# Altium PCB DemoCat.PcbDoc
Units mil, origin at the board's own origin, x right, y up, seen from the top; angles counter-clockwise.
Board outline 3858.27 x 3858.27 mil, 2 copper layers (Top Layer, Bottom Layer); 48 components, 45 nets, 211 pads, 106 vias.
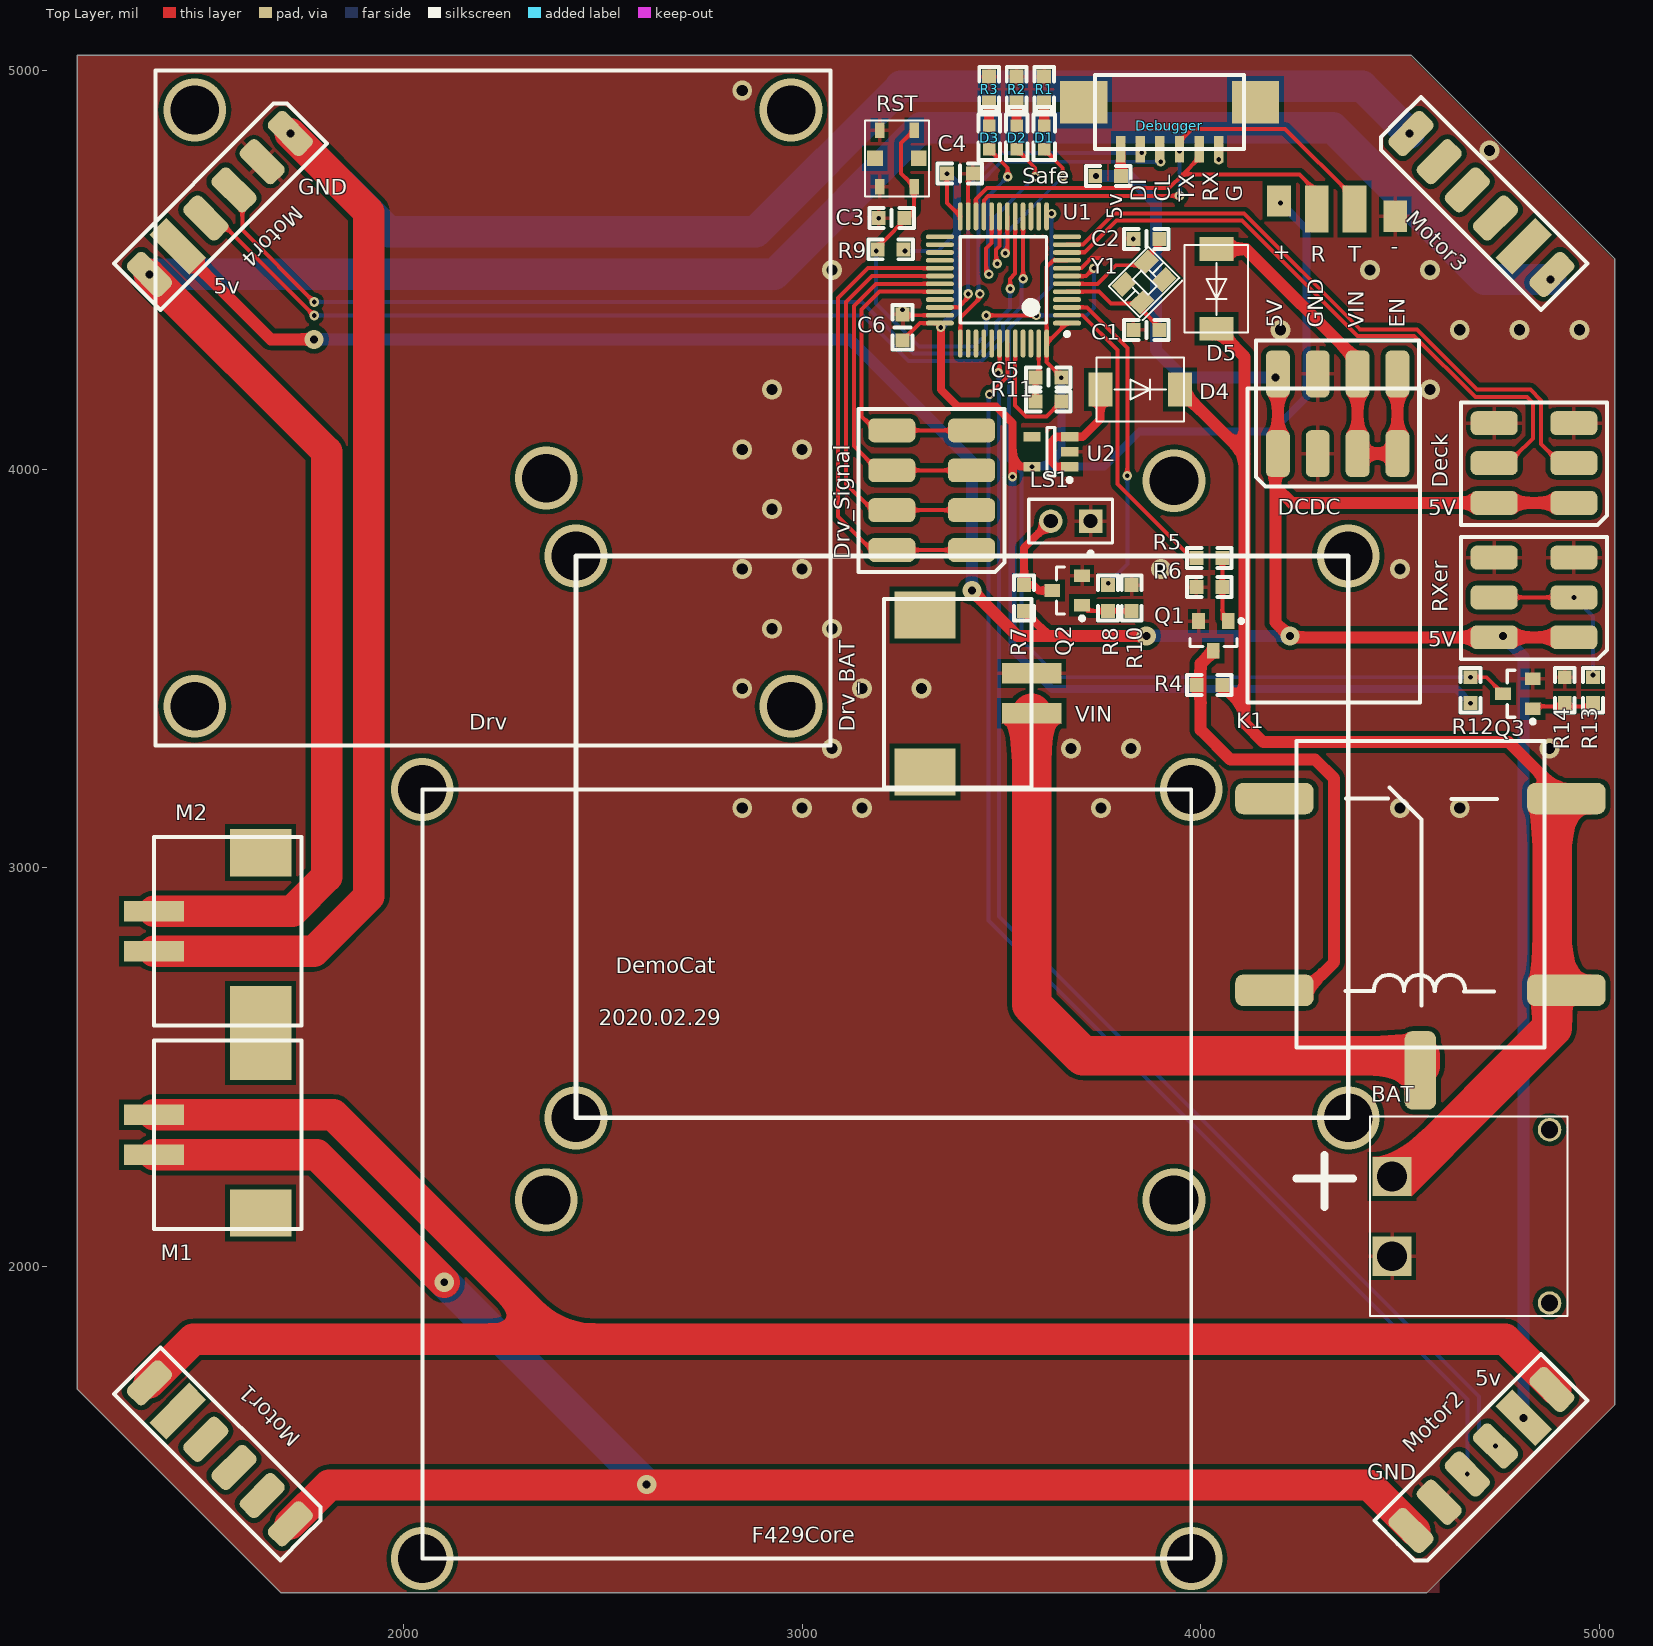
[diagram p0: Top Layer view]
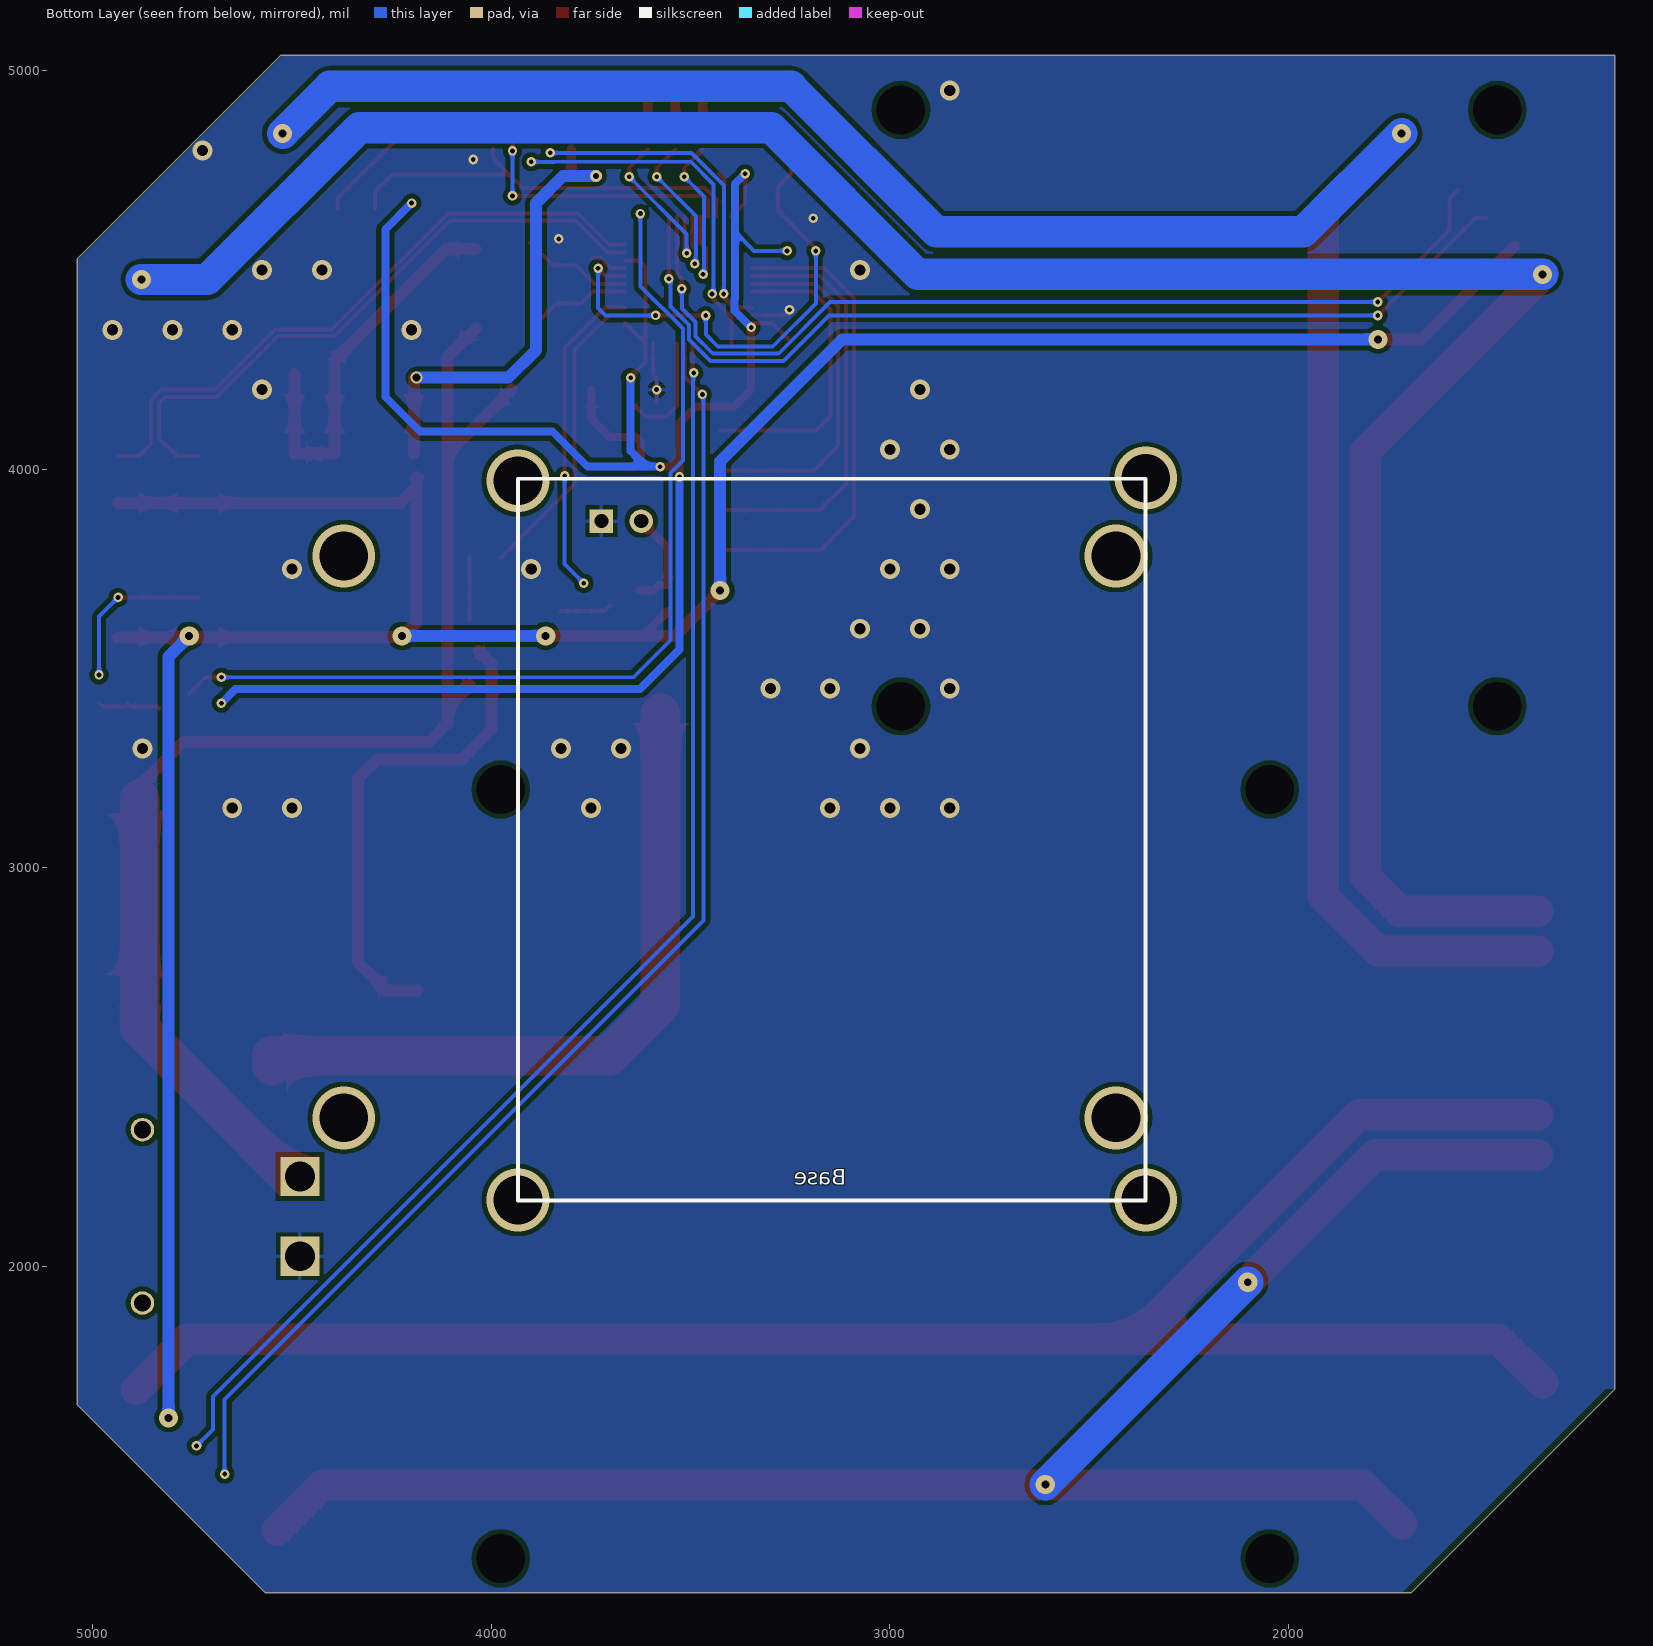
[diagram p1: Bottom Layer view, seen from below]
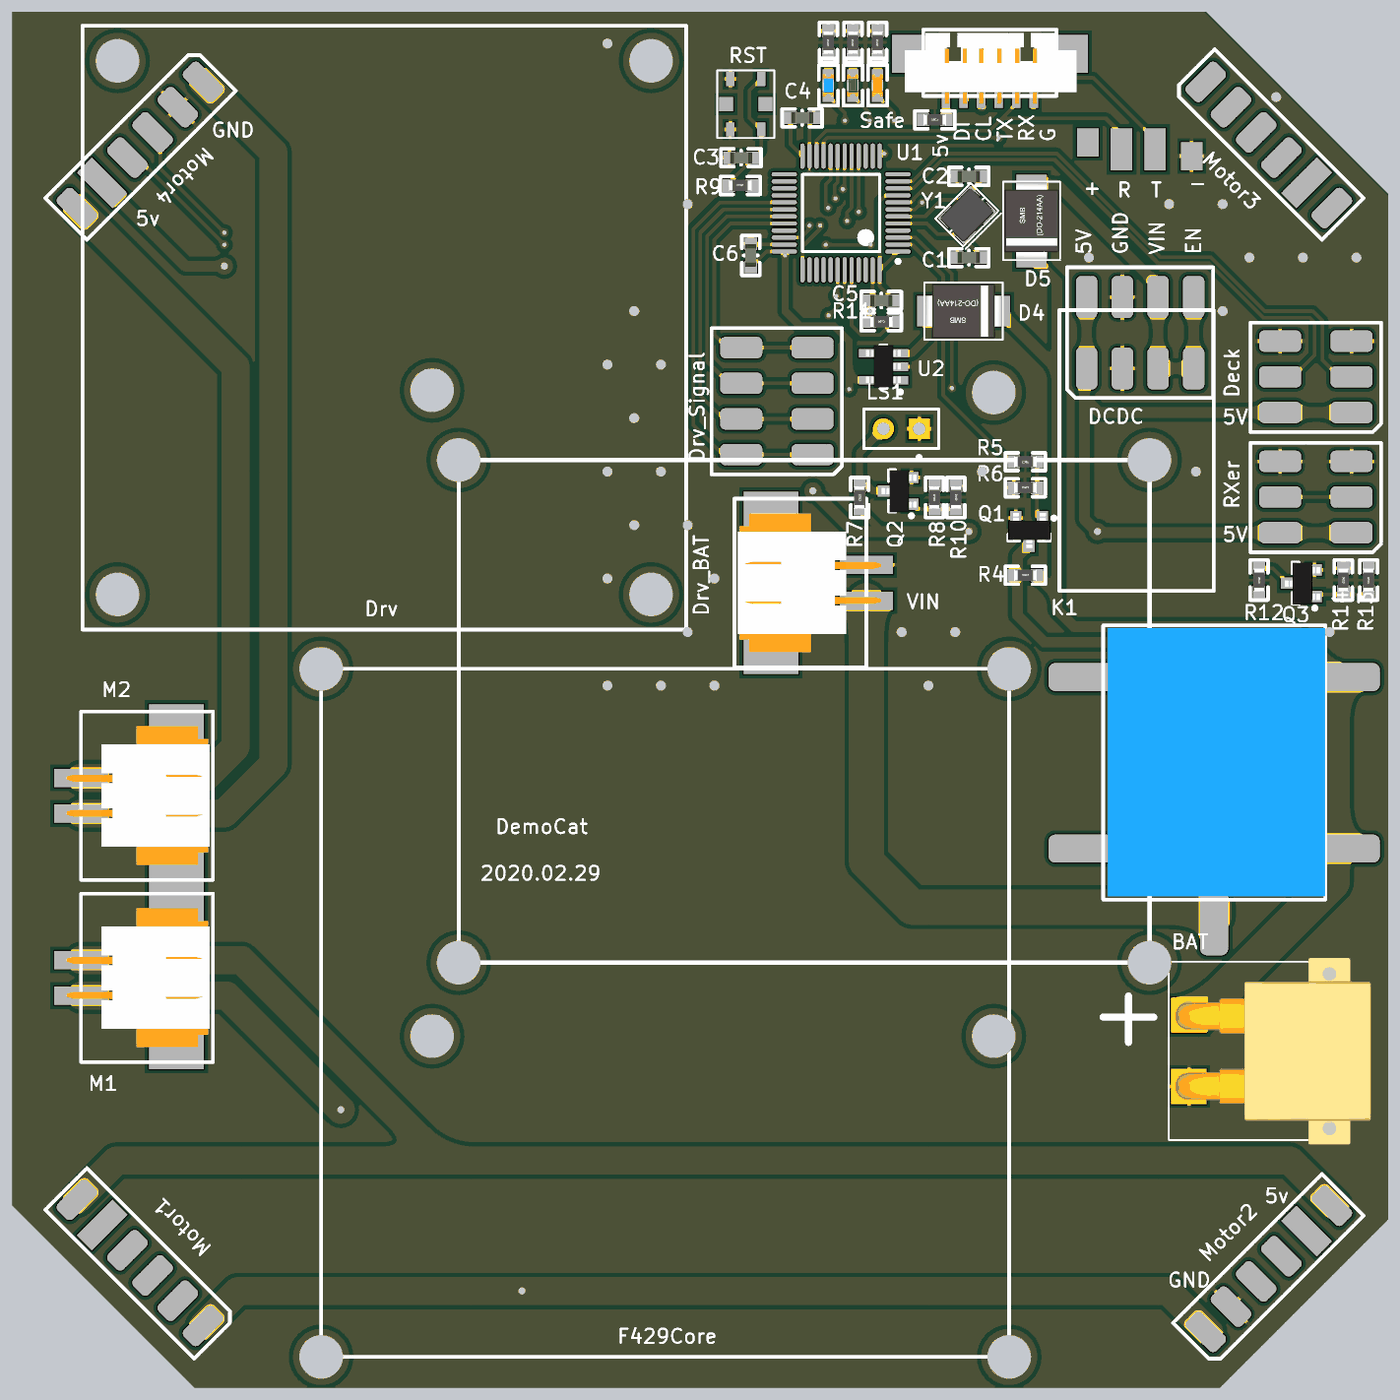
[diagram p2: 3D render of the assembled board from above, using the file's embedded part models]

## Layer stack, top to bottom
Top Solder: solder mask 0.4, Solder Resist, Dk 3.5
Top Layer: signal copper 1.4
Dielectric 1: dielectric 12.6, FR-4, Dk 4.8
Bottom Layer: signal copper 1.4
Bottom Solder: solder mask 0.4, Solder Resist, Dk 3.5

## Board outline
1692.91,1181.1 1181.1,1692.91 1181.1,5039.37 4527.56,5039.37 5039.37,4527.56 5039.37,1653.54 4566.93,1181.1

## Design rules (kind name [scope] priority, off if disabled: settings)
Clearance [All] p1: gap=6 ignorepadtopadclearanceinfootprint=FALSE
PolygonConnect [All] p1: connectstyle=Relief reliefconductorwidth=10 reliefentries=4 polygonreliefangle="90 Angle" airgapwidth=10
RoutingVias [All] p1: holewidth=11.81 width=23.62 viastyle="Through Hole" minholewidth=11.81 minwidth=23.62 maxholewidth=129.92 maxwidth=137.8
SolderMaskExpansion [All] p1: expansion=4
Width [All] p1: maxlimit=196.85 minlimit=10 preferedwidth=10
30 further rules are at their usual default settings.

## Components (designator, comment, footprint, x,y, rotation, side; value= is the part's Value field where it differs from the comment)
BAT "XT60" XT30-IN-W 4480.31,2125.98 r270 top
C1 "Cap" 0603C 3863.57,4350 r0 top value=20pF
C2 "Cap" 0603C 3863.57,4578 r0 top value=20pF
C3 "Cap" 0603C 3224.65,4630.06 r0 top value=100nF
C4 "Cap" 0603C 3396,4741.76 r180 top value=100nF
C5 "Cap" 0603C 3618,4230 r0 top value=100nF
C6 "Cap" 0603C 3252,4356 r270 top value=100nF
D1 "LED0" "0603LED - Red" 3607.4,4832.93 r90 top
D2 "LED0" "0603LED - Green" 3538.4,4832.93 r90 top
D3 "LED0" "0603LED - Blue" 3469.4,4832.93 r90 top
D4 "IN4148" DO-214AA(SMB) 3848.43,4200 r180 top
D5 "IN4148" DO-214AA(SMB) 4039.37,4452.76 r90 top
DCDC "Header 4X2" HDR_SMT_2x4 4193.7,4039.37 r90 top
Debugger "Header 6" GX1.25_T_6P 3922.24,4803.15 r0 top
Deck "Header 3X2" HDR_SMT_2x3 4936.38,3915.75 r180 top
Drv_BAT "Header 2" XH2.54_2P_T 3576,3438 r90 top
Drv_Signal "Header 4X2" HDR_SMT_2x4 3425.2,3797.64 r180 top
K1 "Relay" rl 4314.96,2692.91 r90 top
LS1 "Speaker" PIN2 3724,3870 r180 top
M1 "Header 2" XH2.54_2P_T 1374.33,2330.71 r270 top
M2 "Header 2" XH2.54_2P_T 1374.33,2841.34 r270 top
Motor1 "Header 6" HDR_SMT_1x6 1716.22,1354.64 r225 top
Motor2 "Header 6" HDR_SMT_1x6 4527.56,1337.94 r135 top
Motor3 "Header 6" HDR_SMT_1x6 4527.56,4842.52 r45 top
Motor4 "Header 6" HDR_SMT_1x6 1716.22,4842.52 r315 top
Q1 "AO3400" SOT-23-MOS 4032,3582 r270 top
Q2 "AO3400" SOT-23-MOS 3665.04,3696 r180 top
Q3 "SI2310" SOT-23-MOS 4795.79,3437.01 r180 top
R1 "10K" 0603R 3607.53,4952.93 r90 top
R2 "10K" 0603R 3538.53,4952.93 r90 top
R3 "10K" 0603R 3469.53,4952.93 r90 top
R4 "Res2" 0603R 4021.73,3459.31 r0 top value=1K
R5 "Res2" 0603R 4021.75,3777.58 r180 top value=1K
R6 "Res2" 0603R 4021.73,3704.55 r0 top value=1K
R7 "Res2" 0603R 3557.04,3677.28 r270 top value=1K
R8 "Res2" 0603R 3767.04,3677.28 r90 top value=1K
R9 "10K" 0603R 3222.41,4552.06 r0 top
R10 "Res2" 0603R 3827.04,3677.28 r270 top value=1K
R11 "Res2" 0603R 3618,4170 r0 top value=10K
R12 "Res2" 0603R 4677.17,3445.89 r270 top value=1K
R13 "Res2" 0603R 4984.25,3445.89 r90 top value=1K
R14 "Res2" 0603R 4913.39,3445.89 r270 top value=1K
RST "SW-PB" KeySwitch-3X3 3237.91,4780.06 r270 top (schematic designator S1)
RXer "Header 3X2" HDR_SMT_2x3 4936.38,3578.68 r180 top
Safe "Res2" 0603R 3768,4736.22 r0 top value=1A
U1 "STM32F100C8T6B" STM-LQFP48_N 3505.21,4475.14 r180 top
U2 "RT9013-3.3" SOT-23-5 3624,4044 r180 top
Y1 "8Mhz" 3225-CrystalOsclitor 3858,4470 r225 top

## Footprints (in the part's own frame and the unit in brackets; to place one, negate y for a bottom-side part, rotate by r counter-clockwise, add the part's x,y. Pads: shape width x height; smd on the part's side, far side on the other; paste and mask are expansions set on the pad)
0603C [mil]
  rect 35x35 smd: 1(-32.5,0) 2(32.5,0)
  silkscreen extent -56,-25 56,25, body extent -31,-16 31,15, height 18
"0603LED - Blue" [mm]
  rect 0.8x0.8 smd: 1(-0.762,0) 2(0.738,0)
  silkscreen extent -1.45,-0.69 1.93,0.69, body extent -0.8,-0.4 0.8,0.4, height 0.6
"0603LED - Green" [mm]
  rect 0.8x0.8 smd: 1(-0.762,0) 2(0.738,0)
  silkscreen extent -1.45,-0.69 1.93,0.69, body extent -0.8,-0.4 0.8,0.4, height 0.6
"0603LED - Red" [mm]
  rect 0.8x0.8 smd: 1(-0.762,0) 2(0.738,0)
  silkscreen extent -1.45,-0.69 1.93,0.69, body extent -0.8,-0.4 0.8,0.4, height 0.6
0603R [mil]
  rect 35x35 smd: 1(-32.5,0) 2(32.5,0)
  silkscreen extent -56,-25 56,25, body extent -31,-16 32,16, height 16
3225-CrystalOsclitor [mm]
  rect 1.3x1 smd: 1(-1,-0.8) 2(1,0.8) 3(-1,0.8) 3(1,-0.8)
  silkscreen extent -1.78,-1.4 1.78,1.65, body extent -1.6,-1.25 1.6,1.25, height 0.75
DO-214AA(SMB) [mil]
  rect 60x85 smd: 1(-100,0) 2(100,0)
  silkscreen extent -110,-80 110,80, body extent -108,-77 108,77, height 96
GX1.25_T_6P [mm]
  rect 3x2.7 smd: 0(-5.475,3) 0(5.475,3)
  rect 0.6x1.7 smd: 1(-3.125,0) 2(-1.875,0) 3(-0.625,0) 4(0.625,0) 5(1.875,0) 6(3.125,0)
  silkscreen extent -4.75,0 4.75,4.72, body extent -6.07,-0.58 6.18,4.47, height 3.71
HDR_SMT_1x6 [mil]
  rrect50% 118.11x60 smd: 1(0,0) 2(0,-100) 3(0,-200) 4(0,-300) 6(0,-500)
  rect 141.73x60 smd: 5(0,-400)
  silkscreen extent -83,-543 83,47
HDR_SMT_2x3 [mil]
  rrect50% 118.11x60 smd: 1(0,0) 2(200,0) 3(0,-100) 4(200,-100) 5(0,-200) 6(200,-200)
  silkscreen extent -83,-252 283,55
HDR_SMT_2x4 [mil]
  rrect50% 118.11x60 smd: 1(0,0) 2(200,0) 3(0,-100) 4(200,-100) 5(0,-200) 6(200,-200) 7(0,-300) 8(200,-300)
  silkscreen extent -83,-354 283,55
KeySwitch-3X3 [mm]
  rect 1x0.6 smd: 1(-1.8,1.1) 1(1.8,1.1) 2(-1.8,-1.1) 2(1.8,-1.1)
  rect 1x1 smd: 3(0,1.4) 3(0,-1.4)
  silkscreen extent -2.41,-2.03 2.41,2.03, body extent -2.06,-1.65 2.06,1.65, height 1.3
PIN2 [mm] "Photosensitive Diode; 2 Leads"
  rect 1.5x1.5 hole 0.9: 1(0,0)
  round 1.5 hole 0.9: 2(2.54,0)
  silkscreen extent -1.4,-1.4 3.94,2.17
rl [mm]
  rrect50% 5x2 smd: 1(-5.1,-6)
  rrect50% 2x5 smd: 2(12.217,3.3) 3(12.217,-15.3) 4(0,3.3) 5(0,-15.3)
  silkscreen extent -3.63,-13.92 15.9,1.91, body extent -3.4,-13.91 15.7,1.59, height 15.3
SOT-23-5 [mm] "SOT23, 5-Leads, Body 2.90x2.80mm, Pitch 0.95mm, IPC Medium Density"
  rect 1.1x0.6 smd: 1(-1.2,0.95) 2(-1.2,0) 3(-1.2,-0.95) 4(1.2,-0.95) 5(1.2,0.95)
  silkscreen extent -1.33,-1.55 0.25,1.92, body extent -1.25,-1.53 1.25,1.47, height 1.05
SOT-23-MOS [mm] "SOT23, 3-Leads, Body 2.90x2.45mm, Pitch 0.95mm, IPC Medium Density"
  rect 1x0.8 smd: 1(0.95,0) 2(-0.95,0.95) 3(-0.95,-0.95)
  silkscreen extent -1.07,-1.5 0.67,1.9, body extent -1.33,-1.47 1.17,1.53, height 1.05
STM-LQFP48_N [mm] "QFP, 48-Leads, Body 7x7mm, Pitch 0.5mm, IPC Medium Density"
  oval 1.8x0.3 smd: 1(-4.05,2.75) 2(-4.05,2.25) 3(-4.05,1.75) 4(-4.05,1.25) 5(-4.05,0.75) 6(-4.05,0.25) 7(-4.05,-0.25) 8(-4.05,-0.75) 9(-4.05,-1.25) 10(-4.05,-1.75) 11(-4.05,-2.25) 12(-4.05,-2.75) 25(4.05,-2.75) 26(4.05,-2.25) 27(4.05,-1.75) 28(4.05,-1.25) 29(4.05,-0.75) 30(4.05,-0.25) 31(4.05,0.25) 32(4.05,0.75) 33(4.05,1.25) 34(4.05,1.75) 35(4.05,2.25) 36(4.05,2.75)
  oval 0.3x1.8 smd: 13(-2.75,-4.05) 14(-2.25,-4.05) 15(-1.75,-4.05) 16(-1.25,-4.05) 17(-0.75,-4.05) 18(-0.25,-4.05) 19(0.25,-4.05) 20(0.75,-4.05) 21(1.25,-4.05) 22(1.75,-4.05) 23(2.25,-4.05) 24(2.75,-4.05) 37(2.75,4.05) 38(2.25,4.05) 39(1.75,4.05) 40(1.25,4.05) 41(0.75,4.05) 42(0.25,4.05) 43(-0.25,4.05) 44(-0.75,4.05) 45(-1.25,4.05) 46(-1.75,4.05) 47(-2.25,4.05) 48(-2.75,4.05)
  silkscreen extent -4.18,-2.75 2.75,3.57, body extent -3.5,-3.5 3.5,3.5, height 1.6
XH2.54_2P_T [mm]
  rect 3x3.9 smd: 0(-5,6.792) 0(5,6.792)
  rect 1.3x3.81 smd: 1(-1.27,0) 2(1.27,0)
  silkscreen extent -6,0 6,9.4, body extent -4.94,-1.04 4.94,9.15, height 6.34
XT30-IN-W [mm]
  round 1.5 hole 1.1: 0(-5.525,10.033) 0(5.524,10.033)
  rect 2.5x2.5 hole 1.9: 1(-2.54,0) 2(2.54,0)
  silkscreen extent -6.35,-1.42 6.35,11.18, body extent -6.62,-0.99 6.68,12.96, height 5

## Part data
BAT: library part "Header 2", "Header, 2-Pin", LatestRevisionDate=17-Jul-2002, LatestRevisionNote="Re-released for DXP Platform.", Publisher="Altium Limited"
C1 C2 C3 C4 C5 C6: "Capacitor", LatestRevisionDate=17-Jul-2002, LatestRevisionNote="Re-released for DXP Platform.", PackageDescription="Radial Cap, Thru-Hole; 2 Leads; 0.3 in Pin Spacing", PackageReference=RAD-0.3, Published=8-Jun-2000, Publisher="Altium Limited"
D1 D2 D3: "Typical INFRARED GaAs LED", LatestRevisionDate=08-Jul-2005, LatestRevisionNote="Mech Layer 1 removed.", PackageDescription="LED; 2 Leads", PackageReference=LED-0, Published=8-Jun-2000, Publisher="Altium Limited"
D4 D5: library part Diode, "Default Diode", Code_JEDEC=DO-214-AB, LatestRevisionDate=17-Jul-2002, LatestRevisionNote="Re-released for DXP Platform.", PackageDescription="DO-214-AB/SMC; 2 C-Bend Leads; Body 7.9 x 5.9 mm, inc. leads (LxW)", PackageReference=SMC, PackageVersion=Sep-1996, Published=8-Jun-2000, Publisher="Altium Limited"
DCDC Drv_Signal: "Header, 4-Pin, Dual row", LatestRevisionDate=17-Jul-2002, LatestRevisionNote="Re-released for DXP Platform.", Publisher="Altium Limited"
Debugger Motor1 Motor2 Motor3 Motor4: "Header, 6-Pin", LatestRevisionDate=17-Jul-2002, LatestRevisionNote="Re-released for DXP Platform.", Publisher="Altium Limited"
Deck RXer: "Header, 3-Pin, Dual row", LatestRevisionDate=17-Jul-2002, LatestRevisionNote="Re-released for DXP Platform.", Publisher="Altium Limited"
Drv_BAT M1 M2: "Header, 2-Pin", LatestRevisionDate=17-Jul-2002, LatestRevisionNote="Re-released for DXP Platform.", Publisher="Altium Limited"
K1: "SPDT Relay", LatestRevisionDate=17-Jul-2002, LatestRevisionNote="Re-released for DXP Platform.", PackageReference=MODULE5B, Published=8-Jun-2000, Publisher="Altium Limited"
LS1: "Loudspeaker", LatestRevisionDate=17-Jul-2002, LatestRevisionNote="Re-released for DXP Platform.", PackageReference=PIN2, Published=24-Mar-1999, Publisher="Altium Limited"
Q1 Q2 Q3: library part MOSFET-N, "N-Channel MOSFET", LatestRevisionDate=17-Jul-2002, LatestRevisionNote="Re-released for DXP Platform.", PackageDescription="TO, Flat Index; 3 In-Line, Axial Leads; Body Dia. 4.6mm; Lead Dia. 0.5 mm (max)", PackageReference=E3, PackageVersion=1995/1996, Published=8-Jun-2000, Publisher="Altium Limited"
R1 R2 R3 R9: library part Res2, "Resistor", LatestRevisionDate=17-Jul-2002, LatestRevisionNote="Re-released for DXP Platform.", PackageDescription="Axial Device, Thru-Hole; 2 Leads; 0.4 in Pin Spacing", PackageReference=AXIAL-0.4, Published=8-Jun-2000, Publisher="Altium Limited"
R4 R5 R6 R7 R8 R10 R11 R12 R13 R14 Safe: "Resistor", LatestRevisionDate=17-Jul-2002, LatestRevisionNote="Re-released for DXP Platform.", PackageDescription="Axial Device, Thru-Hole; 2 Leads; 0.4 in Pin Spacing", PackageReference=AXIAL-0.4, Published=8-Jun-2000, Publisher="Altium Limited"
RST: "Switch", LatestRevisionDate=17-Jul-2002, LatestRevisionNote="Re-released for DXP Platform.", PackageDescription="Switch; 2 Leads", PackageReference=SPST-2, Published=24-Mar-1999, Publisher="Altium Limited"
U1: "ARM Cortex-M3 32-bit MCU, 64 KB Flash, 8 KB Internal RAM, 37 I/Os, 48-pin LQFP, -40 to 85 degC, Tray", I/Os (High Current)=37, Operating Frequency(F) (Processor speed) (MHz)=24, Supplier Part Number 1=497-10499-ND, Supply Voltage(Vcc) min (V)=2, A/D Converter="1x12-bit (10 Channel)", ComponentLink1Description="Manufacturer URL", ComponentLink1URL=http://www.st.com/web/en/home.html, ComponentLink2Description=Datasheet, ComponentLink2URL=http://www.st.com/st-web-ui/static/active/en/resource/technical/document/datasheet/CD00251732.pdf, ComponentLink3Description="Package Specification", ComponentLink3URL=http://www.st.com/st-web-ui/static/active/en/resource/technical/document/datasheet/DM00058181.pdf, Core="ARM Cortex-M3", D/A Converter="2x12-bit (2 Channel)", DatasheetVersion="Rev. 7", FLASH Size (Prog) (kB)=64, Internal RAM Size (kB)=8, Mounting Technology="Surface Mount", PackageDescription="48-Pin Low Profile Quad Flat Package, 7 x 7 mm Body, 0.5 mm Pitch", PackageReference=LQFP48, PackageVersion="Rev. 6, 06/2013", Packing=Tray, PartNumber=STM32F100C8T6B, Supplier 1=Digi-Key, Supplier 2=Farnell, Supplier 3=Newark, Supplier 4=Mouser, Supplier Part Number 2=1838511, Supplier Part Number 3=76R0988, Supplier Part Number 4=511-STM32F100C8T6B
U2: library part RT9013, "3.3V 500mA"
Y1: library part XTAL, LatestRevisionDate=17-Jul-2002, LatestRevisionNote="Re-released for DXP Platform.", PackageDescription="Crystal, Thru-Hole; 2 Leads; Body 3.1 x 8.2 mm (Dia.xH)", PackageReference=R38, Published=8-Jun-2000, Publisher="Altium Limited"

## Free pads (board coordinates)
  rect 60x78.74 smd: 2(4196.85,4673.23) 2(4488.19,4634.59)
  rect 60x118.11 smd: 3(4291.34,4653.54) 4(4385.83,4653.54)

## Via types
v1: diameter 50, hole 28, Top Layer to Bottom Layer, tented both sides, 33 vias
v2: diameter 24, hole 12, Top Layer to Bottom Layer, tented both sides, 28 vias
v3: diameter 23.62, hole 11.81, Top Layer to Bottom Layer, tented both sides, 15 vias
v4: diameter 48, hole 20, Top Layer to Bottom Layer, tented both sides, 12 vias
v5: diameter 157.48, hole 122.05, Top Layer to Bottom Layer, tented both sides, 8 vias
v6: diameter 157.48/50 (per signal layer), hole 122.05, Top Layer to Bottom Layer, tented both sides, 8 vias
v7: diameter 30, hole 20, Top Layer to Bottom Layer, tented both sides, 1 vias
v8: diameter 30, hole 15, Top Layer to Bottom Layer, tented both sides, 1 vias

## Nets (pads, with @x,y where several pads share a name; then routed paths per layer and width w, separated by ;. In a path a pad name is that pad's centre, name@x,y a point inside that pad or via, vN(x,y) a via of type N, cw(c..) or ccw(c..) an arc to the next point about the centre after c; other vN are vias at no path point)
3v3: C4.2 C5.2 C6.2 pad.2@4196.85,4673.23 R9.2 R12.2 U1.1 U1.9 U1.24 U1.36 U1.48 U2.5 | length 4937.5
  Top Layer w10: C6.2 3295.37,4366.87 U1.36 ; v3(3363.5,4741.76) 3363.5,4668.04 U1.24 ; C5.2@3653,4230 3613.48,4269.52 U1.48 ; U1.1 U1.48 ; U1.9 3630.35,4524.35 3613.48,4507.48 U1.48
  Top Layer w20: v3(3348,4356) 3348,4200 3390,4158 3486,4158 3528,4116 3528,4026 ; v3(3528,3981.1) 3528,4026 ; v3(3576.76,4006.6) 3547.4,4006.6 3528,4026
  Bottom Layer w10: v2(3258,4548) 3340.82,4548 3388.82,4596
  Bottom Layer w20: v3(3348,4356) 3389.76,4397.76 3389.76,4427.54 3388.82,4428.48 3388.82,4596 3388.82,4716.44 v3(3363.5,4741.76) ; v3(3528,3981.1) 3528,3547.91 3627.09,3448.82 4641.73,3448.82 v3(4677.17,3413.39) ; v3(3576.76,4006.6) 3610.6,4006.6 ; v2(3650.5,4230) 3650.5,4046.5 3610.6,4006.6 ; v2(4200,4668) 4266,4602 4266,4182 4178.5,4094.5 3846,4094.5 3758.1,4006.6 3610.6,4006.6
5v: DCDC.1 DCDC.2 Deck.1 Deck.2 Motor2.5 Motor4.5 R7.2 RXer.1 RXer.2 Safe.1 | length 8398
  Top Layer w20: R7.2 3619.81,3582
  Top Layer w30: Motor4.5 1667.06,4326 v4(1776,4326) ; v4(3426,3696) 3540,3582 3619.81,3582 v4(3863.57,3582) ; Safe.1 v8(3738,4736.22) ; DCDC.1@4187.4,3981.1 4187.4,3956.69 ; DCDC.1 DCDC.2@4193.7,4230 ; v4@4222.91,3580.91 4187.4,3616.41 4187.4,3956.69 ; v4@4225.13,3578.68 RXer.2 ; RXer.2@4758,3578.68 RXer.1 ; v4(4809.62,1620) Motor2.5 ; Deck.1 Deck.2 4228.35,3915.75 4187.4,3956.69
  Bottom Layer w30: v4(1776,4326) 3120,4326 3426,4020 v4(3426,3696) ; v8(3738,4736.22) 3819.78,4736.22 3888,4668 3888,4299.19 3957.19,4230 v7(4188,4230) ; v4(3863.57,3582) v4(4224,3582) ; v4(4758,3582) 4809.62,3530.38 v4(4809.62,1620)
Beep_EN: R8.2 U1.3 | length 804
  Top Layer w10: U1.3 3714.51,4406.24 3816,4304.76 v2(3816,3984)
  Bottom Layer w10: v2(3768,3714) 3816,3762 v2(3816,3984)
Drv_BAT: Drv_BAT.1 K1.1 | length 1783.7
  Top Layer w98.43: Drv_BAT.1 3576,2657.6 3705,2528.6 4551.18,2528.6 K1.1@4551.18,2503.94
Drv_EN: R5.2 U1.2 | length 761.6
  Top Layer w10: U1.2 3703.99,4386.56 3791.34,4299.21 3791.34,3963.67 R5.2@3977.44,3777.58
GND: BAT.2 C1.1 C2.1 C3.1 C4.1 C5.1 C6.1 DCDC.3 DCDC.4 Debugger.6 Deck.5 Deck.6 Drv_BAT.2 LS1.1 Motor2.2 Motor4.2 pad.2@4488.19,4634.59 Q1.3 Q2.3 Q3.3 R1.2 R2.2 R3.2 R6.1 R10.1 R11.1 R14.1 RST.2 RXer.5 RXer.6 U1.8 U1.23 U1.35 U1.47 U2.2 | length 450.8
  Top Layer w10: C6.1 3253.94,4386.56 U1.35 ; U1.23 3416.63,4729.89 C4.1 ; R11.1 v2(3585.5,4200) C5.1 ; C5.1@3588,4230 3593.8,4235.8 U1.47 ; U1.8 3700.56,4504.67 3709.28,4513.39 3709.28,4514.2 3725.86,4530.78 3745.96,4530.78 3748.43,4528.31
  other v1: 2850,3150 3000,3150 3150,3150 3750,3150 4500,3150 4650,3150 3075,3300 3675,3300 3825,3300 4875,3300 2850,3450 3150,3450 3300,3450 2925,3600 3075,3600 2850,3750 3000,3750 3900,3750 4500,3750 2925,3900 2850,4050 3000,4050 2925,4200 4575,4200 4200,4350 4650,4350 4800,4350 4950,4350 3075,4500 4425,4500 4575,4500 4725,4800 2850,4950
  other v2: 3252,4400.16 3831.07,4578 3192.15,4630.06 4045.28,4777.34
MH1: M1.1 Motor1.6 Motor2.6 | length 4871.3
  Top Layer w78.74: Motor1.6 1472.48,1818 2386.72,1818 ; M1.1 1824.02,2380.71 2386.72,1818 ; Motor2.6@4890.56,1691.49 4764.06,1818 2386.72,1818
MH2: M2.1 Motor3.6 Motor4.6 | length 5989.5
  Top Layer w78.74: v4(1362.67,4488.97) 1807.09,4044.55 1807.09,2977.56 1720.87,2891.34 M2.1
  Bottom Layer w78.74: v4(1362.67,4488.97) 2929.91,4488.97 3298.13,4857.18 4331.8,4857.18 4712.6,4476.38 v4(4877.95,4476.38)
ML1: M1.2 Motor1.1 Motor2.1 | length 4487.2
  Top Layer w78.74: M1.2 1782.28,2280.71 v4(2102.36,1960.63) ; Motor1.1 1813.58,1452 4422.95,1452 Motor2.1@4537.01,1337.94
  Bottom Layer w78.74: v4(2102.36,1960.63) v4(2610.24,1452.76)
ML2: M2.2 Motor3.1 Motor4.1 | length 5700.7
  Top Layer w78.74: M2.2 1775.59,2791.34 1913.39,2929.13 1913.39,4645.36 v4(1716.22,4842.52)
  Bottom Layer w78.74: v4(1716.22,4842.52) 1962.74,4596 2883.4,4596 3248.03,4960.63 4405.51,4960.63 v4(4523.62,4842.52)
NetC1_2: C1.2 U1.5 Y1.2 | length 269
  Top Layer w10: U1.5 3745.3,4445.61 3774.91,4416 3836.5,4416 C1.2@3896.5,4356
NetC2_2: C2.2 U1.6 Y1.1 | length 280.9
  Top Layer w10: U1.6 3740.63,4465.3 3787.33,4512 3845.19,4512 C2.2@3902.5,4569.31
NetC3_2: C3.2 R9.1 RST.1 U1.7 | length 1327.4
  Top Layer w10: R9.1@3183.91,4552.06 3281.21,4649.37 3281.21,4709.2 3248.65,4741.76 3248.65,4818.36 RST.1@3281.21,4850.93 ; v2(3462,4386) 3462.05,4386.05 v2(3588,4386.05) ; U1.7 3712.6,4484.98 v2(3732.28,4504.67)
  Bottom Layer w10: v2(3186,4548) 3186,4416 3294,4308 3432,4308 3462,4338 v2@3462,4380 ; v2(3588,4386.05) 3713.95,4386.05 3714,4386 3732.28,4404.28 v2(3732.28,4504.67)
NetD1_1: D1.1 U1.18 | length 434.6
  Top Layer w10: v2(3510,4542) 3515.06,4547.06 U1.18 ; D1.1 3654,4756.33 v2(3654,4734)
  Bottom Layer w10: v2(3510,4542) 3510,4590 v2(3654,4734)
NetD1_2: D1.2 R1.1 | length 58.5
  Top Layer w23.62: D1.2 3607.4,4890.99 3607.53,4891.12 R1.1
NetD2_1: D2.1 U1.19 | length 471.4
  Top Layer w10: v2(3489.42,4515.75) 3487,4518.17 3487,4551.53 3495.37,4559.9 U1.19 ; D2.1 3585,4756.33 v2(3585,4734)
  Bottom Layer w10: v2(3489.42,4515.75) 3487,4518.17 3487,4636 v2(3585,4734)
NetD2_2: D2.2 R2.1 | length 58.5
  Top Layer w23.62: D2.2 3538.4,4889.54 3538.53,4889.67 R2.1
NetD3_1: D3.1 U1.20 | length 507.9
  Top Layer w10: v2(3468.84,4489.49) 3462,4496.33 3462,4554 3475.68,4567.69 U1.20 ; D3.1 3516,4756.33 v2(3516,4734)
  Bottom Layer w10: v2(3468.84,4489.49) 3466.42,4491.91 3466.42,4684.42 v2(3516,4734)
NetD3_2: D3.2 R3.1 | length 58.5
  Top Layer w23.62: D3.2 3469.4,4889.54 3469.53,4889.67 R3.1
NetD4_2: D4.2 U2.1 U2.3 | length 322.8
  Top Layer w20: U2.1 3637.76,4006.6 3624,4020.35 3624,4068 3637.4,4081.4 U2.3 3703.4,4081.4 3748.43,4126.43 D4.2
NetD5_2: D5.2 DCDC.5 DCDC.6 DCDC.7 DCDC.8 | length 1003.5
  Top Layer w30: D5.2 4113.33,4552.76 4393.7,4272.39 DCDC.6 DCDC.5 DCDC.7 DCDC.8
NetDebugger_1: Debugger.1 Safe.2 | length 57.3
  Top Layer w23.62: Safe.2@3799.21,4745.88 Debugger.1
NetK1_4: K1.4 Q1.1 R4.1 | length 1236.3
  Top Layer w30: Q1.1 3999.83,3512.43 3999.83,3346.63 4074.8,3271.65 4287.4,3271.65 4334.65,3224.41 4334.65,2763.78 4263.78,2692.91 K1.4
NetLS1_2: LS1.2 Q2.1 R7.1 | length 264.3
  Top Layer w20: LS1.2 3557.04,3803.04 R7.1 3580.02,3709.78 3593.8,3696 Q2.1
NetQ1_2: Q1.2 R5.1 R6.2 | length 155.7
  Top Layer w10: R5.1 R6.2 4054.25,3624.68 Q1.2@4056.22,3622.71
NetQ2_2: Q2.2 R8.1 R10.2 | length 130.3
  Top Layer w10: Q2.2 3716.26,3644.78 R8.1 R10.2
NetQ3_2: Q3.2 R13.1 R14.2 | length 164
  Top Layer w10: Q3.2 4839.09,3405.51 4905.51,3405.51 R14.2 4917.32,3405.51 4972.44,3405.51 R13.1
NetR11_2: R11.2 U1.44 | length 298.2
  Top Layer w10: U1.44 3534.74,4159.69 3561.44,4132.98 3613.48,4132.98 R11.2
SBUS: R13.2 RXer.3 RXer.4 | length 414.3
  Top Layer w10: RXer.4 v3(4936.38,3678.68)
  Bottom Layer w10: v3(4936.38,3678.68) 4984.25,3630.8 v3(4984.25,3484.25)
SWCLK: Debugger.3 U1.37 | length 902.5
  Top Layer w10: U1.37 3396.94,4380.94 3446.25,4430.25 v3(3446.25,4440)
  Bottom Layer w10: v3(3446.25,4440) 3442.37,4443.88 3442.37,4714.37 3499.65,4771.65 3842.09,4771.65 3842.55,4771.19 3899.54,4771.19 v3(3900,4771.65)
SWDIO: Debugger.2 U1.34 | length 832.4
  Top Layer w10: U1.34 3392.24,4406.24 3416.63,4430.63 v3(3416.63,4440)
  Bottom Layer w10: v3(3416.63,4440) 3416.63,4712.63 3497.84,4793.84 3497.68,4794 v3(3852,4794)
T1C1: Drv_Signal.1 Drv_Signal.2 U1.29 | length 1204.2
  Top Layer w10: U1.29 3164.93,4504.67 3090.55,4430.29 3090.55,3881.45 3174.36,3797.64 Drv_Signal.2 Drv_Signal.1
T1C2: Drv_Signal.3 Drv_Signal.4 U1.30 | length 1061
  Top Layer w10: U1.30 3175.24,4484.98 3110.24,4419.98 3110.24,3963.76 3176.36,3897.64 Drv_Signal.4 Drv_Signal.3
T1C3: Drv_Signal.5 Drv_Signal.6 U1.31 | length 910.8
  Top Layer w10: U1.31 3185.56,4465.3 3129.92,4409.66 3129.92,4058.08 3190.36,3997.64 Drv_Signal.6 Drv_Signal.5
T1C4: Drv_Signal.7 Drv_Signal.8 U1.32 | length 773
  Top Layer w10: U1.32 3193.98,4445.61 3149.61,4401.24 3149.61,4133.01 3184.98,4097.64 Drv_Signal.8 Drv_Signal.7
T2C1: Deck.4 U1.10 | length 1596
  Top Layer w10: U1.10 3708.04,4544.04 3788.31,4624.31 4104.03,4624.31 4393.7,4334.65 4535.64,4334.65 4689.18,4181.1 4818.9,4181.1 4833.19,4166.81 4833.19,4077.19 4789.01,4033.01 Deck.4@4736.38,4033.01
T2C2: Deck.3 U1.11 | length 1620.5
  Top Layer w10: U1.11 3705.09,4563.72 3783.1,4641.73 4109.24,4641.73 4400.33,4350.65 4542.27,4350.65 4692.91,4200 4827.08,4200 4854.33,4172.75 4854.33,4062.99 4884.31,4033.01 Deck.3@4936.38,4033.01
T3CH1: Motor4.4 U1.16 | length 2500.2
  Top Layer w10: Motor4.4 1531.05,4630.39 v2@1775.44,4386 ; v3(3554.43,4478.21) U1.16
  Bottom Layer w10: v2@1775.44,4386 v2(1776,4386) 3153.21,4386 3267.21,4272 3450,4272 3503.68,4325.69 3503.68,4361.69 3550,4408 3550,4473.79 v3(3554.43,4478.21)
T3CH2: Motor4.3 U1.17 | length 2472.4
  Top Layer w10: Motor4.3 1596,4679.9 1596,4599.89 v2(1776,4419.89) v2@1776,4416 ; v3(3522,4452.74) 3522,4478.05 3534.74,4490.79 U1.17
  Bottom Layer w10: v2(1776,4419.89) 3150,4419.89 3279.89,4290 3444,4290 3487.68,4333.69 3487.68,4369.69 3522,4404 v3(3522,4452.74)
T4CH1: Motor2.4 U1.42 | length 3283.8
  Top Layer w10: v2(3492,4242) 3495.37,4245.37 U1.42
  Bottom Layer w10: v2(3492,4242) 3493.53,4240.47 3493.53,4178.47 3493.53,2878.47 4698,1674 4698,1591.76 v2(4739.69,1550.07)
T4CH2: Motor2.3 U1.43 | length 3358.2
  Top Layer w10: v2(3470.53,4188) 3515.06,4232.53 U1.43
  Bottom Layer w10: v2@3468,4194 3468,4188 3468,2868 4668.98,1667.02 v2(4668.98,1479.36)
U2RX: Q3.1 R12.1 U1.13 | length 2396.2
  Top Layer w10: R12.1@4681.15,3474.41 v2(4677.17,3478.39) 4717,3478.39 Q3.1
  Bottom Layer w10: v3(3625.98,4641.72) 3625.97,4459.22 3519.68,4352.93 3519.68,4021.68 3550.81,3990.55 3550.81,3571.24 3643.66,3478.39 v2(4677.17,3478.39)
U3RX: Debugger.5 pad.3 U1.22 | length 1065.2
  Top Layer w10: U1.22 3436.31,4677.97 3463.85,4705.5 3471.19,4705.5 3471.37,4705.69 3920.87,4705.69 3955.19,4740 ; Debugger.5 3996.06,4780.87 3955.19,4740 ; pad.3 4291.34,4696.66 4248,4740 3955.19,4740
U3TX: Debugger.4 pad.4 U1.21 | length 1218.9
  Top Layer w10: U1.21 3456,4675.02 3466.98,4686 v2(3946.85,4686) ; Debugger.4 3946.85,4822.85 3978,4854 4212,4854 4385.83,4680.17 pad.4
  Bottom Layer w10: v2(3946.85,4686) v3(3946.85,4798.85)
VBAT: BAT.1 D4.1 D5.1 K1.3 K1.5 R4.2 | length 3332.9
  Top Layer w30: D4.1 4110.24,4038.19 ; D5.1 4110.24,4281.89 4110.24,4038.19 ; R4.2 4110.24,3403.3 ; BAT.1@4475.03,2225.98 BAT.1 BAT.1@4509.45,2225.98 ; K1.3@4881.89,3173.91 4881.89,3206.44 4772.69,3315.65 4157.48,3315.65 4110.24,3362.89 4110.24,3403.3 ; 4110.24,3403.3 4110.24,4038.19
  Top Layer w98.43: BAT.1@4509.45,2225.98 4881.89,2598.43 K1.3@4881.89,3173.91
pads on no net: BAT.0 Debugger.0 Drv_BAT.0 K1.2 M1.0 M2.0 Motor1.2 Motor1.3 Motor1.4 Motor1.5 Motor3.2 Motor3.3 Motor3.4 Motor3.5 RST.3 U1.4 U1.12 U1.14 U1.15 U1.25 U1.26 U1.27 U1.28 U1.33 U1.38 U1.39 U1.40 U1.41 U1.45 U1.46 U2.4 Y1.3
copper on no net:
  other v5: 2358.39,2166.92 3933.19,2166.92 2433,2373 4370.01,2373 2433,3782.45 4370.01,3782.45 3933.19,3971.56 2358.39,3977.94
  other v6: 2047.24,1267.72 3976.38,1267.72 2047.24,3196.85 3976.38,3196.85 1476.38,3405.51 2972.44,3405.51 1476.38,4901.57 2972.44,4901.57

## Polygon pours and split planes (outlines as drawn)
GND on Bottom Layer (solid, pour order 8): 1181.1,5039.37 1181.1,1692.91 1204.41,1692.91 1716.22,1181.1 4566.93,1181.1 5039.37,1653.54 5039.37,4523.62 4523.62,5039.37
GND on Top Layer (solid, pour order 10): 1181.1,5039.37 1181.1,1691.49 1182.52,1691.49 1692.91,1181.1 4598.27,1181.1 4598.27,1212.44 5039.37,1653.54 5039.37,4523.62 4523.62,5039.37

## Silkscreen, mask and mechanical layers (free items; w line width, h text height)
Top Overlay:
  lines w10: 1377.95,3307.09 3070.87,3307.09 3070.87,5000 1377.95,5000 1377.95,3307.09 ; 2047.24,1267.72 3976.38,1267.72 3976.38,3196.85 2047.24,3196.85 2047.24,1267.72 ; 4117.04,3415.43 4550.11,3415.43 4550.11,4202.83 4117.04,4202.83 4117.04,3415.43
  lines w11.81: 2433,2373 2433,3782.45 4370.01,3782.45 4370.01,2373 2433,2373
  lines w19.68: 4239.96,2220.47 4381.89,2220.47 ; 4311.02,2149.61 4311.02,2279.53
  text "GND" at 1736.22,4688.98 h39.37
  text "DI" at 3863.28,4670.8 h39.37 r90
  text "CL" at 3923.41,4670.8 h39.37 r90
  text "TX" at 3983.55,4670.8 h39.37 r90
  text "RX" at 4043.68,4670.8 h39.37 r90
  text "G" at 4103.81,4670.8 h39.37 r90
  text "5v" at 3803.15,4626 h39.37 r90
  text "-" at 4476.38,4540.74 h39.37
  text "+" at 4181.1,4527.62 h39.37
  text "R" at 4275.59,4521.06 h39.37
  text "T" at 4370.08,4521.06 h39.37
  text "5v" at 1523.62,4440.94 h39.37
  text "5V" at 4204.72,4355.05 h39.37 r90
  text "GND" at 4307.09,4355.05 h39.37 r90
  text "VIN" at 4409.45,4355.05 h39.37 r90
  text "EN" at 4511.81,4355.05 h39.37 r90
  text "5V" at 4570.87,3884.25 h39.37
  text "5V" at 4570.87,3555.12 h39.37
  text "VIN" at 3685.04,3366.14 h39.37
  text "Drv" at 2165.35,3346.46 h39.37
  text "DemoCat" at 2532,2736 h39.37
  text "2020.02.29" at 2490,2605.12 h39.37
  text "5v" at 4688.98,1700.79 h39.37
  text "GND" at 4417.32,1464.57 h39.37
  text "F429Core" at 2874.02,1307.09 h39.37
Bottom Overlay:
  lines w10: 2358.39,2165.35 3933.19,2165.35 3933.19,3976.38 2358.39,3976.38 2358.39,2165.35
  text "Base" at 3110.24,2204.72 h39.37
Drill Drawing:
  the board outline again, w39.37